# Altium PCB LoRa Shield.PcbDoc
Units mm, origin at the board's own origin, x right, y up, seen from the top; angles counter-clockwise.
Board outline 64.99 x 56 mm, 2 copper layers (Top Layer, Bottom Layer), stack 1.554 mm thick; 9 components, 16 nets, 88 pads, 10 vias.
Unrouted connection lines stored in the file: 1.
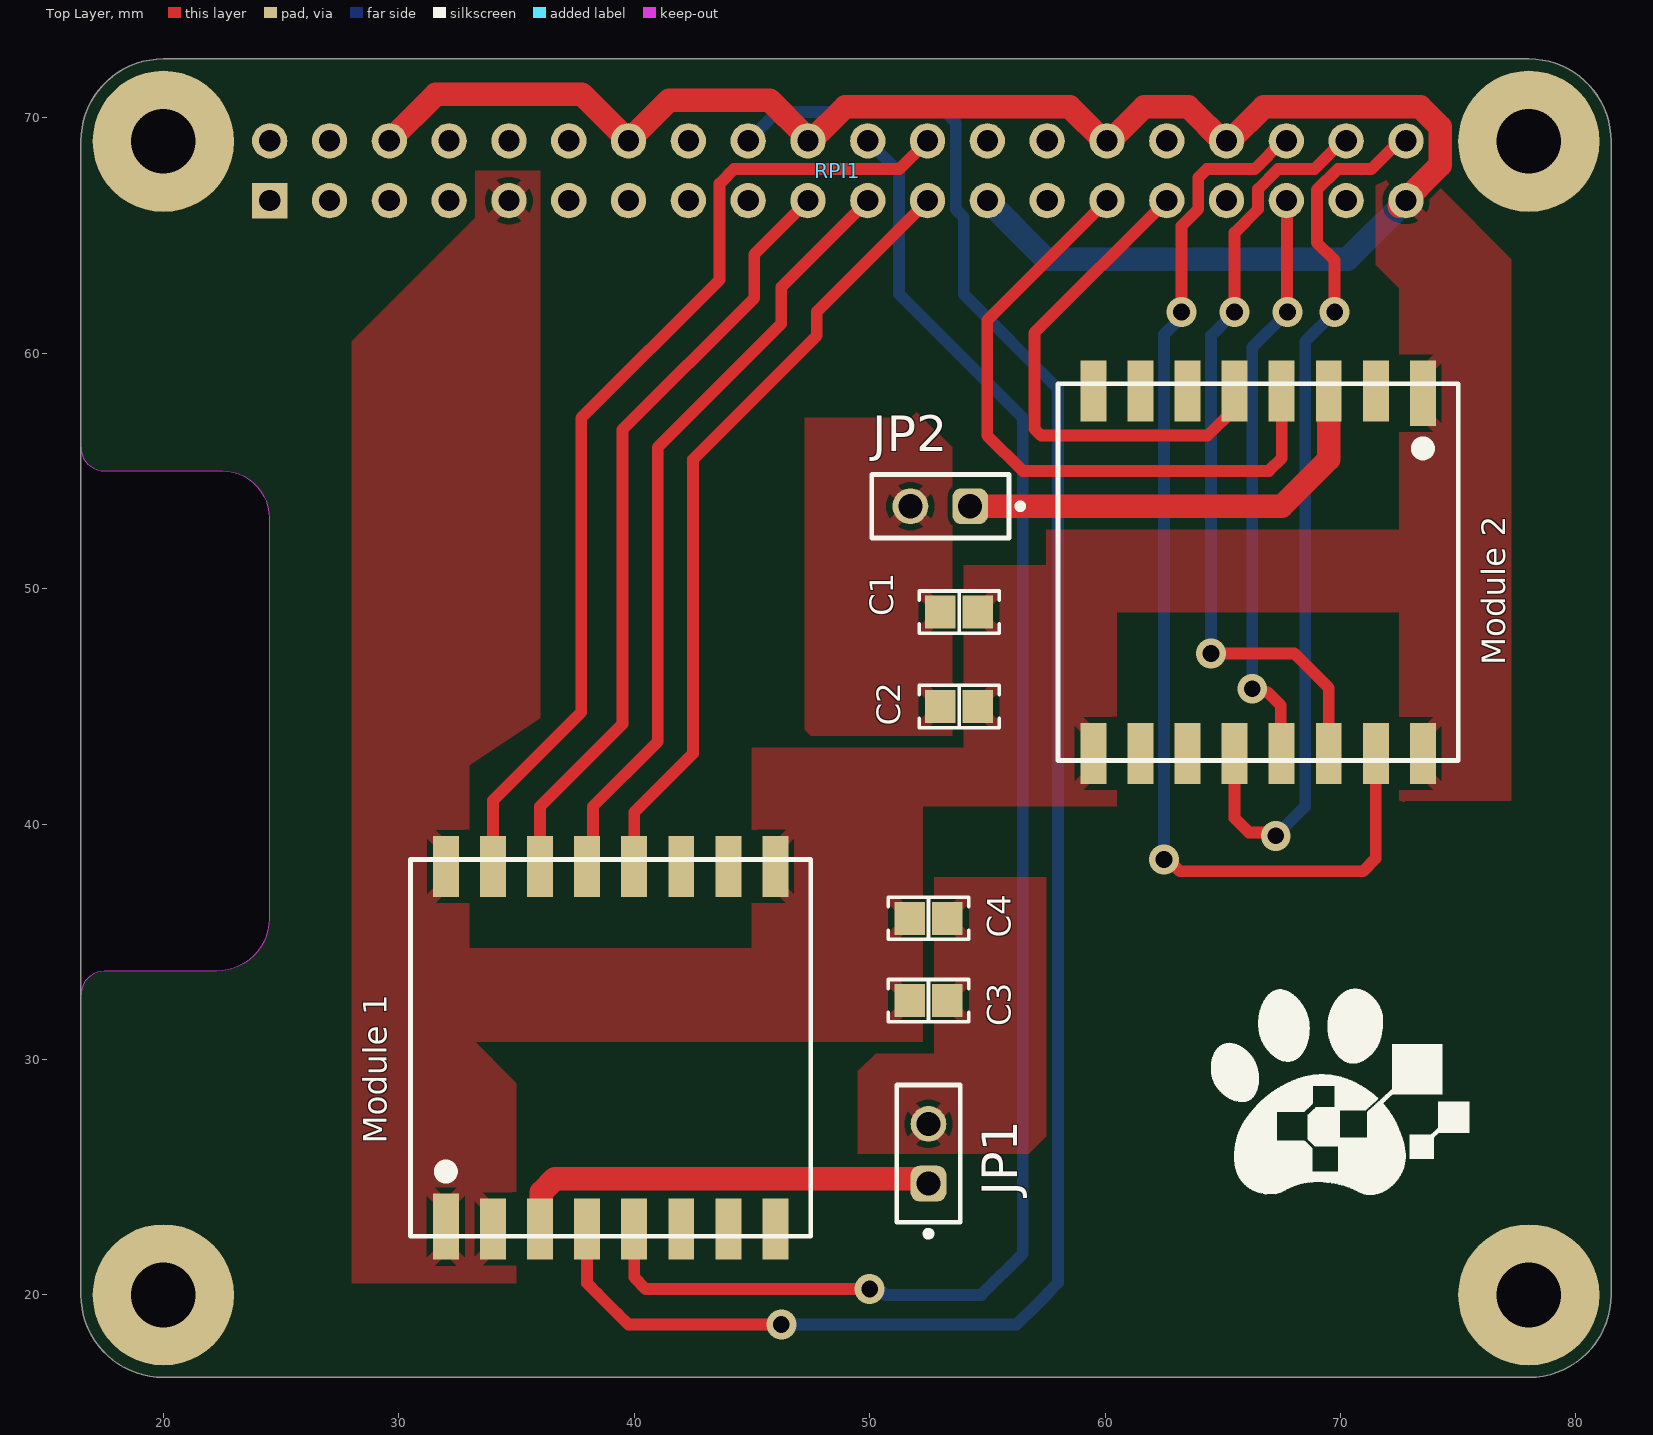
[diagram p0: Top Layer view]
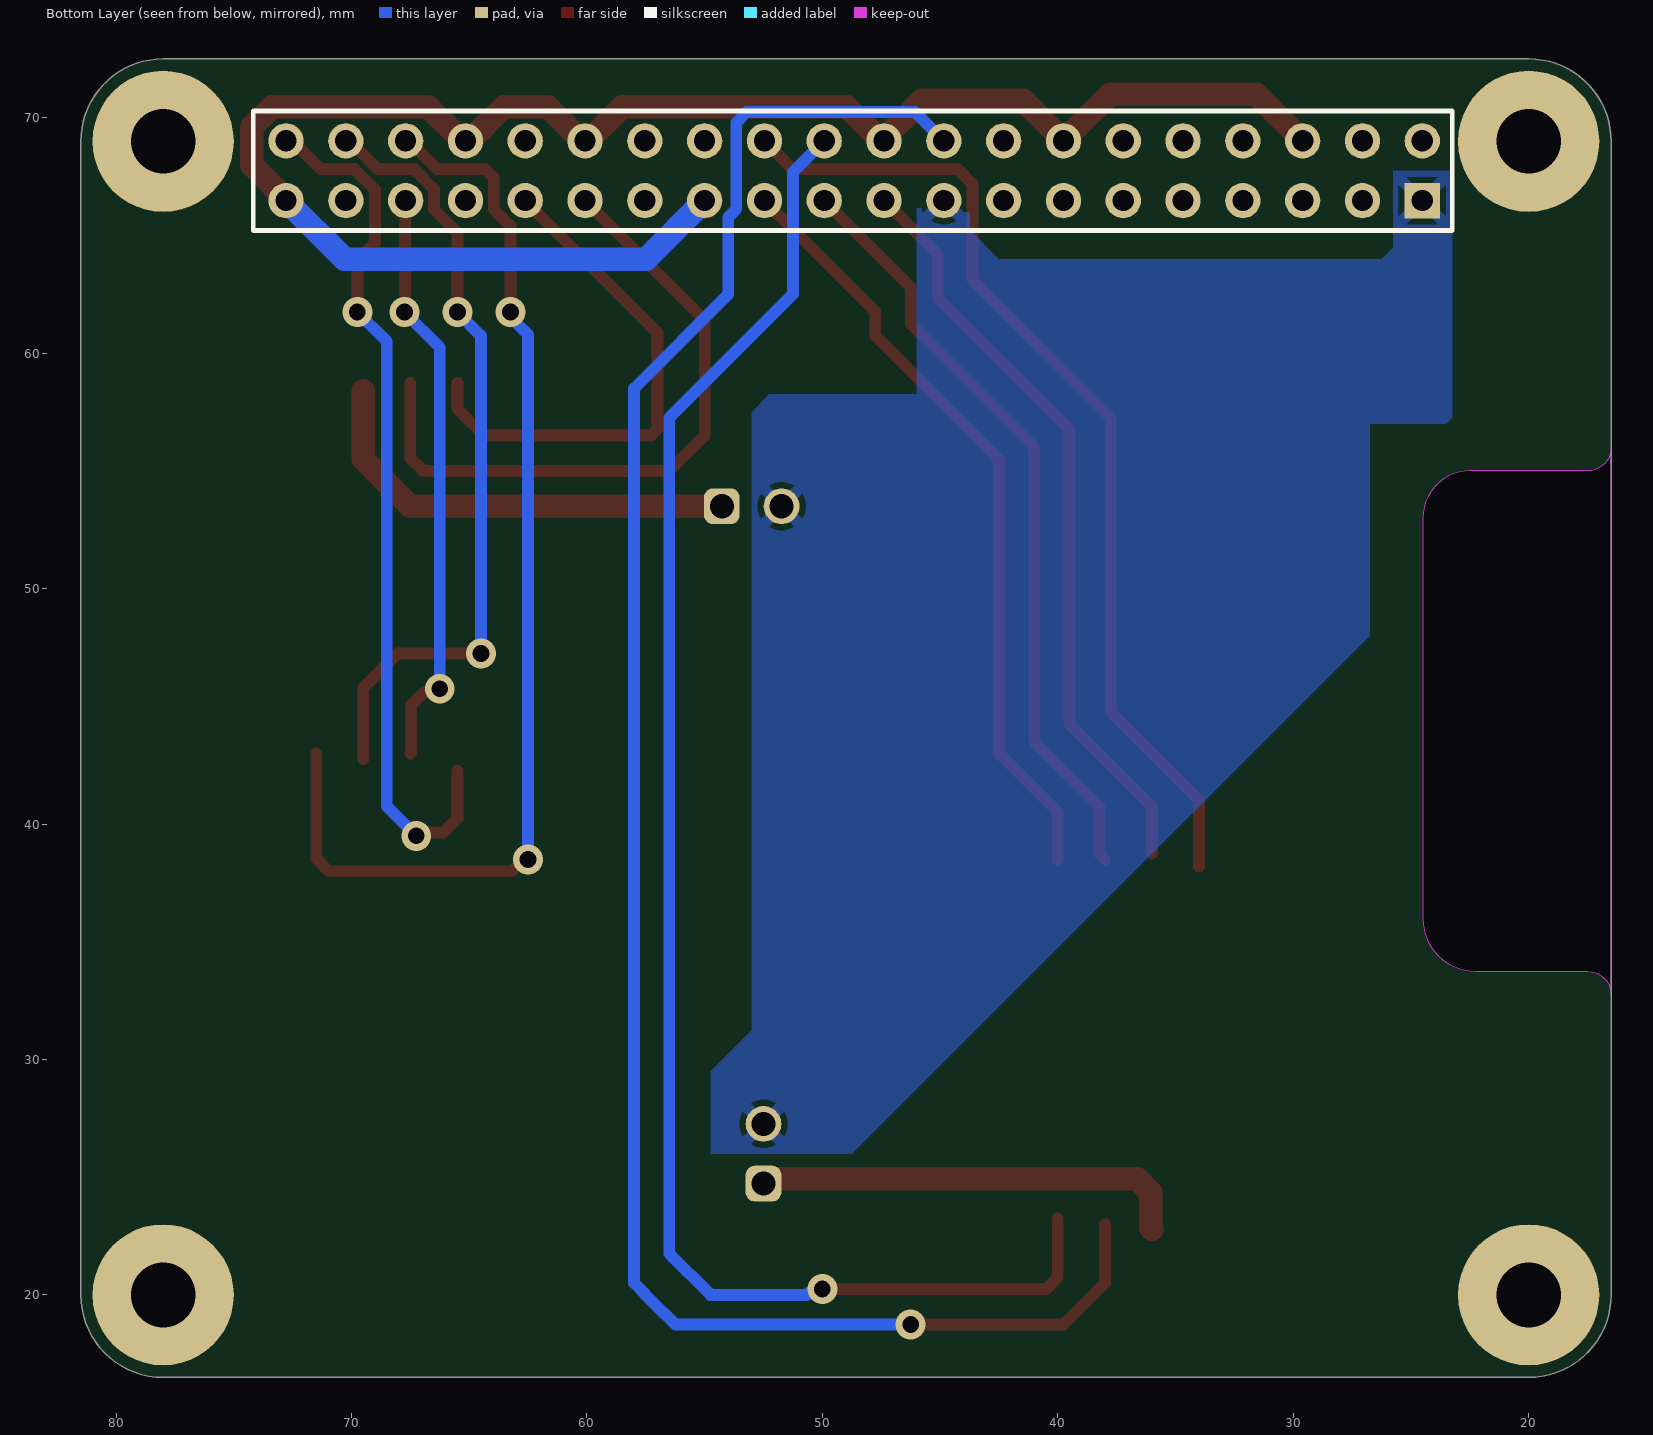
[diagram p1: Bottom Layer view, seen from below]

## Layer stack, top to bottom
Top Solder: solder mask 0.0203, Solder Resist, Dk 3.5
Top Layer: signal copper 0.0533
Dielectric 1: dielectric 1.4478, FR-4, Dk 4.6
Bottom Layer: signal copper 0.0533
Bottom Solder: solder mask 0.0203, Solder Resist, Dk 3.5

## Board outline
16.5,20 ccw(c20,20) 20,16.5 78,16.5 ccw(c77.996,19.996) 81.492,20 81.492,69 ccw(c77.996,69.004) 78,72.5 20,72.5 ccw(c20,69) 16.5,69
cut-out: 16.5,32.75 16.5,56 ccw(c17.5,56) 17.5,55 22.5,55 cw(c22.5,53) 24.5,53 24.5,36 cw(c22.25,36) 22.25,33.75 17.5,33.75 ccw(c17.5,32.75)

## Design rules (kind name [scope] priority, off if disabled: settings)
Clearance [All] p1: gap=0.2 ignorepadtopadclearanceinfootprint=FALSE
PlaneConnect [All] p1: planeconnectstyle=Relief reliefexpansion=0.508 reliefentries=4 reliefconductorwidth=0.5 reliefairgap=0.254
PolygonConnect [All] p1: connectstyle=Relief reliefconductorwidth=0.5 reliefentries=4 polygonreliefangle="45 Angle" airgapwidth=0.254
RoutingVias [All] p1: holewidth=0.711 width=1.27 viastyle="Through Hole" minholewidth=0.2 minwidth=0.15 maxholewidth=0.711 maxwidth=1.27
SolderMaskExpansion [All] p1: expansion=0.102 istentingtop=FALSE
SupplyNets "Schematic Supply Nets_3" [InNet('GND')] p1: voltage=0.000
SupplyNets "Schematic Supply Nets_2" [InNet('3V3')] p2: voltage=0.000
UnRoutedNet [All] p1: checkbadconnections=TRUE
UnpouredPolygon [All] p1: allowunpoured=TRUE
Width [All] p1: maxlimit=5 minlimit=0.2 preferedwidth=1 minimp=50.000000 maximp=50.000000 favimp=50.000000
27 further rules are at their usual default settings.

## Components (designator, comment, footprint, x,y, rotation, side; value= is the part's Value field where it differs from the comment)
C1 "22 µF" "CAP 0805_2012" 53.8,49 r180 top
C2 "0.1µF" "CAP 0805_2012" 53.8,45 r180 top
C3 "22 µF" "CAP 0805_2012" 52.5,32.5 r0 top
C4 "0.1µF" "CAP 0805_2012" 52.5,36 r0 top
JP1 "61300211821" 61300211821 52.5,26 r90 top
JP2 "61300211821" 61300211821 53,53.5 r180 top
"Module 1" "RA-02" RA-02 39,30.5 r90 top locked
"Module 2" "RA-02" RA-02 66.5,50.7 r270 top locked
RPI1 "RPI GPIO Connector" RPI 48.65,67.75 r180 top locked

## Footprints (in the part's own frame and the unit in brackets; to place one, negate y for a bottom-side part, rotate by r counter-clockwise, add the part's x,y. Pads: shape width x height; smd on the part's side, far side on the other; paste and mask are expansions set on the pad)
61300211821 [mm] "Socket Header, Pitch 2.54 mm, THT, Vertical, single row, 2p"
  rrect50% 1.52x1.52 hole 1.02: 1(-1.27,0)
  round 1.52 hole 1.02: 2(1.27,0)
  silkscreen extent -3.52,-1.35 2.92,1.35, body extent -2.79,-1.25 2.79,1.25, height 8.55
"CAP 0805_2012" [mm] "Chip Capacitor, 2-Leads, Body 2.00x1.20mm, IPC Medium Density"
  rect 1.3x1.4 smd: 1(-0.8,0) 2(0.8,0)
  silkscreen extent -1.7,-0.9 1.7,0.9, body extent -1,-0.64 1,0.64, height 1.26
RA-02 [mm]
  rect 2.8x1.1 smd: 1(-7.6,7)
  rect 2.6x1.1 smd: 2(-7.7,5) 3(-7.7,3) 4(-7.7,1) 5(-7.7,-1) 6(-7.7,-3) 7(-7.7,-5) 8(-7.7,-7) 9(7.7,-7) 10(7.7,-5) 11(7.7,-3) 12(7.7,-1) 13(7.7,1) 14(7.7,3) 15(7.7,5) 16(7.7,7)
  silkscreen extent -8,-8.5 8,8.5, body extent -8.5,-8.5 8.5,8.5, height 3.3
RPI [mm]
  rect 1.5x1.5 hole 0.9: 1(24.13,1.27)
  round 1.5 hole 0.9: 2(24.13,-1.27) 3(21.59,1.27) 4(21.59,-1.27) 5(19.05,1.27) 6(19.05,-1.27) 7(16.51,1.27) 8(16.51,-1.27) 9(13.97,1.27) 10(13.97,-1.27) 11(11.43,1.27) 12(11.43,-1.27) 13(8.89,1.27) 14(8.89,-1.27) 15(6.35,1.27) 16(6.35,-1.27) 17(3.81,1.27) 18(3.81,-1.27) 19(1.27,1.27) 20(1.27,-1.27) 21(-1.27,1.27) 22(-1.27,-1.27) 23(-3.81,1.27) 24(-3.81,-1.27) 25(-6.35,1.27) 26(-6.35,-1.27) 27(-8.89,1.27) 28(-8.89,-1.27) 29(-11.43,1.27) 30(-11.43,-1.27) 31(-13.97,1.27) 32(-13.97,-1.27) 33(-16.51,1.27) 34(-16.51,-1.27) 35(-19.05,1.27) 36(-19.05,-1.27) 37(-21.59,1.27) 38(-21.59,-1.27) 39(-24.13,1.27) 40(-24.13,-1.27)
  body extent -25.52,-2.63 25.53,2.38, height 8.5

## Part data
C1 C3: library part CL21A226KOQNNNG, "CAP CER 22UF 16V X5R 0805", Device Package="0805 (2012 Metric)", manufacturer="Samsung Electro-Mechanics", Operating Temperature="-55°C ~ 85°C", Supplier Part Number 1=1276-7092-1-ND, Temperature Coefficient=X5R, Tolerance=±10%, Voltage - Rated=16V, Applications="General Purpose", Capacitance="22 µF", componentlink1description=Datasheet, componentlink1url=//media.digikey.com/pdf/Data%20Sheets/Samsung%20PDFs/CL21A226KOQNNNG_Spec.pdf, componentlink2description="DigiKey Link", componentlink2url=https://www.digikey.com/en/products/detail/samsung-electro-mechanics/CL21A226KOQNNNG/3894433, lastupdated="2/9/2024 8:16:07 PM", Lifecycle Status=Active, Minimum Order=1, Mounting Type="Surface Mount, MLCC", Package / Case="0805 (2012 Metric)", packaging=TapeAndReel, Part Number=CL21A226KOQNNNG, Part Status=Active, partid=3000, price=0.06, series=CL, Size / Dimension="0.079\" L x 0.049\" W (2.00mm x 1.25mm)", Supplier 1=DigiKey, Thickness (Max)="0.055\" (1.40mm)"
C2 C4: library part LD055C104KAB2A, "CAP CER 0.1UF 50V X7R 0805", Device Package="0805 (2012 Metric)", manufacturer="AVX Corporation", Operating Temperature="-55°C ~ 125°C", Supplier Part Number 1=478-4931-1-ND, Temperature Coefficient=X7R, Tolerance=±10%, Voltage - Rated=50V, Applications="General Purpose", Capacitance=0.1µF, componentlink1description=Datasheet, componentlink1url=http://datasheets.avx.com/LD-Series.pdf, componentlink2description="DigiKey Link", componentlink2url=http://digikey.com/product-detail/en/avx-corporation/LD055C104KAB2A/478-4931-1-ND/1858877, lastupdated="9/2/2020 1:04:40 AM", Lifecycle Status=Active, Minimum Order=1, Mounting Type="Surface Mount, MLCC", Package / Case="0805 (2012 Metric)", packaging=TapeAndReel, Part Number=LD055C104KAB2A, Part Status=Active, partid=3356, price=0.16, series=LD, Size / Dimension="0.079\" L x 0.049\" W (2.01mm x 1.25mm)", Supplier 1=DigiKey, Thickness (Max)="0.037\" (0.94mm)"
JP1 JP2: "WR-PHD Socket Header, THT, Vertical, pitch 2.54mm, 1 Row, 2P", Contact Resistance=20mOhm, manufacturer="Wurth Elektronik", Operating Temperature Max=125°C, Operating Temperature Min=-40°C, Rated Current=3A, Withstanding Voltage=500V, Working Voltage=250V, Category="Board-to-Board Connectors", componentlink1description="Website Link", componentlink1url=https://www.we-online.com/redexpert/article/61300211821?ad, componentlink2description="Datasheet Link", componentlink2url=https://www.we-online.com/redexpert/spec/61300211821?ad, Gender="Socket Header", Manufacturer Part Number=61300211821, Match Code=WR-PHD, Mount="Through Hole", Number of Pins=2, Number of Rows=1, Orientation=Vertical, packaging=Tray, Pitch=2.54mm
"Module 1" "Module 2": library part CMP-005-000000-1, "General ISM < 1GHz LoRaâ„¢ Transceiver Module 410MHz ~ 525MHz Antenna Not Included, I-PEX Surface Mount", Package=None, Availability="Not in stock", Check_prices=https://www.snapeda.com/parts/RA-02/AI-Thinker/view-part/?ref=eda, Component Type=Standard, Design Item ID=RA-02, MF=Ai-Thinker, MP=RA-02, Pin Count=16, price=None, SnapEDA_Link=https://www.snapeda.com/parts/RA-02/AI-Thinker/view-part/?ref=snap, Source=RA-02.SchLib
RPI1: library part "rpi connector", "GPIO Header for Raspberry Pi A+/B+/Pi 2/Pi 3 - 2x20", manufacturer="SparkFun Electronics", Manufacturer Part Number=PRT-14017, Supplier Part Number 1=1568-1462-ND, Accessory Type=Connector, Category="Development Boards, Kits, Programmers", componentlink1description=https://cdn.sparkfun.com/datasheets/Dev/RaspberryPi/12313.pdf, componentlink1url=https://cdn.sparkfun.com/datasheets/Dev/RaspberryPi/12313.pdf, For Use With/Related Products="Raspberry Pi", Nils Minor=author, nilsminor@web.de=mail, Part Status=Active, Pricing 1="1=1.84 (EUR)", RoHS="RoHS Compliant", Stock 1=150, Supplier 1=Digi-Key

## Free pads (board coordinates)
  round 6 hole 2.75: ""(20,20) ""(20,69) ""(78,20) ""(78,69)

## Via types
v1: diameter 1.27, hole 0.711, Top Layer to Bottom Layer, 10 vias

## Nets (pads, with @x,y where several pads share a name; then routed paths per layer and width w, separated by ;. In a path a pad name is that pad's centre, name@x,y a point inside that pad or via, vN(x,y) a via of type N, cw(c..) or ccw(c..) an arc to the next point about the centre after c; other vN are vias at no path point)
3V3: C1.2 C2.2 C3.2 C4.2 JP1.2 JP2.2 RPI1.1 RPI1.17 | length 0.1
  Bottom Layer w1: RPI1.17@44.75,66.39 RPI1.17@44.75,66.5 ; JP1.2@52.5,27.25 JP1.2
DIO01: "Module 1.5" RPI1.22 | length 70
  Top Layer w0.5: 40,23.25 40,20.75 40.5,20.25 v1(50,20.25)
  Bottom Layer w0.5: RPI1.22 51.25,67.69 51.25,62.5 56.5,57.25 56.5,21.75 54.75,20 50.678,20 50.575,20.103 50.147,20.103 v1(50,20.25)
DIO02: "Module 2.5" RPI1.31 | length 22.2
  Top Layer w0.5: RPI1.31 57,60.86 57,56.793 57.293,56.5 64.35,56.5 65.5,57.65 65.5,58.75
GND: "Module 1.1" "Module 1.2" "Module 1.9" "Module 1.16" "Module 2.1" "Module 2.2" "Module 2.9" "Module 2.16" C1.1 C2.1 C3.1 C4.1 RPI1.6 RPI1.9 RPI1.14 RPI1.20 RPI1.25 RPI1.30 RPI1.34 RPI1.39 | length 74.8
  Top Layer w0.254: RPI1.9@34.566,66.594 RPI1.9
  Top Layer w1: RPI1.6 31.58,71 37.78,71 RPI1.14 41.49,70.75 45.75,70.75 RPI1.20@47.267,69.233 ; RPI1.20 47.515,69.02 48.965,70.47 58.495,70.47 RPI1.30@59.965,69 ; RPI1.30 60.215,69.02 61.665,70.47 63.53,70.47 RPI1.34@65.07,68.93 ; RPI1.34 65.295,69.02 66.745,70.47 73.381,70.47 74.23,69.621 74.23,67.98 RPI1.39@72.5,66.25
  Bottom Layer w1: RPI1.25 57.48,64 70.3,64 72.75,66.45 RPI1.39@72.75,66.5
NetJP1_1: "Module 1.3" JP1.1 | length 18.4
  Top Layer w1: 36,22.8 36.05,22.85 36.05,24.355 36.636,24.941 52.289,24.941 JP1.1
NetJP2_1: "Module 2.3" JP2.1 | length 19
  Top Layer w1: JP2.1 67.5,53.5 69.5,55.5 69.5,58.4
RST1: "Module 1.4" RPI1.18 | length 84.6
  Top Layer w0.5: 38,23 38,20.5 38.437,20.062 39.312,19.188 39.75,18.75 v1(46.25,18.75)
  Bottom Layer w0.5: RPI1.18 46.07,70.25 53.207,70.25 53.66,69.797 53.66,66.123 54,65.783 54,62.5 58,58.5 58,20.51 57.56,20.07 57.56,20.06 56.69,19.19 56.68,19.19 56.24,18.75 v1(46.25,18.75)
RST2: "Module 2.4" RPI1.29 | length 28.6
  Top Layer w0.5: RPI1.29 55,61.4 55,56.5 56.5,55 66.957,55 67.5,55.543 67.5,58.4 67.5,58.75
SPI0_CS0: "Module 1.15" RPI1.24 | length 42.8
  Top Layer w0.5: 34,38.2 34,41 37.75,44.75 37.75,57.25 43.625,63.125 43.625,67.207 44.238,67.82 51.26,67.82 RPI1.24 52.5,69.06 RPI1.24@52.5,69.25
SPI0_MISO: "Module 1.13" RPI1.21 | length 32.9
  Top Layer w0.5: 38,38.5 38.25,38.75 38.25,40.75 41,43.5 41,56 46.25,61.25 46.25,62.81 RPI1.21
SPI0_MOSI: "Module 1.14" RPI1.19 | length 32.4
  Top Layer w0.5: 36,38.75 36,40.75 39.5,44.25 39.5,56.75 45.094,62.344 45.094,64.194 RPI1.19
SPI0_SCLK: "Module 1.12" RPI1.23 | length 33.1
  Top Layer w0.5: 40,38.5 40,40.5 42.5,43 42.5,55.5 47.75,60.75 47.75,61.77 RPI1.23
SPI1_CS0: "Module 2.15" RPI1.36 | length 47.8
  Top Layer w0.5: v1(62.5,38.5) 62.678,38.5 63.178,38 70.957,38 71.5,38.543 71.5,43 ; v1(63.25,61.75) 63.25,65.413 63.96,66.123 63.96,67.46 64.32,67.82 66.353,67.82 67.553,69.02 RPI1.36
  Bottom Layer w0.5: v1(62.5,38.5) 62.5,60.792 63.25,61.542 v1(63.25,61.75)
SPI1_MISO: "Module 2.13" RPI1.35 | length 25.2
  Top Layer w0.5: v1(66.25,45.75) 66.397,45.603 66.905,45.603 67.458,45.05 67.458,43.042 67.5,43 ; RPI1.35 67.725,66.455 67.725,61.775 v1(67.75,61.75)
  Bottom Layer w0.5: v1(66.25,45.75) 66.25,60.25 v1(67.75,61.75) ; RPI1.35 RPI1.35@67.7,66.751
SPI1_MOSI: "Module 2.14" RPI1.38 | length 33.8
  Top Layer w0.5: v1(64.5,47.25) 68.034,47.25 69.5,45.784 69.5,42.75 ; v1(65.5,61.75) 65.5,65.123 66.495,66.118 66.495,66.972 67.343,67.82 68.893,67.82 70.093,69.02 RPI1.38
  Bottom Layer w0.5: v1(64.5,47.25) 64.5,60.75 v1(65.5,61.75)
SPI1_SCLK: "Module 2.12" RPI1.40 | length 37.5
  Top Layer w0.5: 65.5,42.25 65.5,40.25 66.103,39.647 67.103,39.647 v1(67.25,39.5) ; v1(69.75,61.75) 69.75,63.948 69,64.698 69,66.937 69.883,67.82 71.31,67.82 72.51,69.02 RPI1.40
  Bottom Layer w0.5: v1(67.25,39.5) 68.5,40.75 68.5,60.5 v1(69.75,61.75)
pads on no net: "Module 1.6" "Module 1.7" "Module 1.8" "Module 1.10" "Module 1.11" "Module 2.6" "Module 2.7" "Module 2.8" "Module 2.10" "Module 2.11" RPI1.2 RPI1.3 RPI1.4 RPI1.5 RPI1.7 RPI1.8 RPI1.10 RPI1.11 RPI1.12 RPI1.13 RPI1.15 RPI1.16 RPI1.26 RPI1.27 RPI1.28 RPI1.32 RPI1.33 RPI1.37

## Polygon pours and split planes (outlines as drawn)
GND on Top Layer "GND_L01_P004" (solid, pour order 4): 57.5,52.5 72.5,52.5 72.5,62.75 71.5,63.75 71.5,67.125 73.25,68 77.25,64 77.25,41 72.75,41 72.5,40.75 72.5,49 57.5,49
3V3 on Top Layer "3V3_L01_P008" (solid, pour order 8): 47.25,44 47.5,43.75 53.5,43.75 53.5,56 52,57.5 51.75,57.25 47.25,57.25
3V3 on Top Layer "3V3_L01_P006" (solid, pour order 6): 52.75,37.75 57.5,37.75 57.5,26.75 56.75,26 49.5,26 49.5,29.5 50.25,30.25 52.75,30.25
GND on Top Layer "GND_L01_P001" (solid, pour order 1): 45,34.729 32.006,34.729 32.006,30.75 52.25,30.75 52.25,40.75 60.5,40.75 60.5,49.25 57.5,51 54,51 54,43.25 45,43.25
GND on Top Layer "GND_L01_P000" (solid, pour order 0): 35,20.5 35,29 33,31 33,42.5 36,44.5 36,46.5 36,67.75 33.25,67.75 33.25,65.75 28,60.5 28,20.5 31.5,20.5
3V3 on Bottom Layer "3V3_L02_P009" (solid, pour order 9): 23.25,67.75 25.75,67.75 25.75,64.5 26.25,64 42.5,64 43.75,65.25 43.75,67.75 45.5,67.75 46,67.25 46,58.25 52.25,58.25 53,57.5 53,31.25 54.75,29.5 54.75,26 48.75,26 26.75,48 26.75,57 23.5,57 23.25,57.25

## Silkscreen, mask and mechanical layers (free items; w line width, h text height)
Top Overlay:
  drawing of 5 lines, arcs and shapes, not listed
M2: Outline:
  the board outline again, w0.254